# Altium PCB doorzoom_new.PcbDoc
Units mil, origin at the board's own origin, x right, y up, seen from the top; angles counter-clockwise.
Board outline 7799.21 x 2870.08 mil, 2 copper layers (Top Layer, Top, Bottom Layer, Bottom); 7 components, 5 nets, 27 pads, 2 vias.
Unrouted connection lines stored in the file: 2.
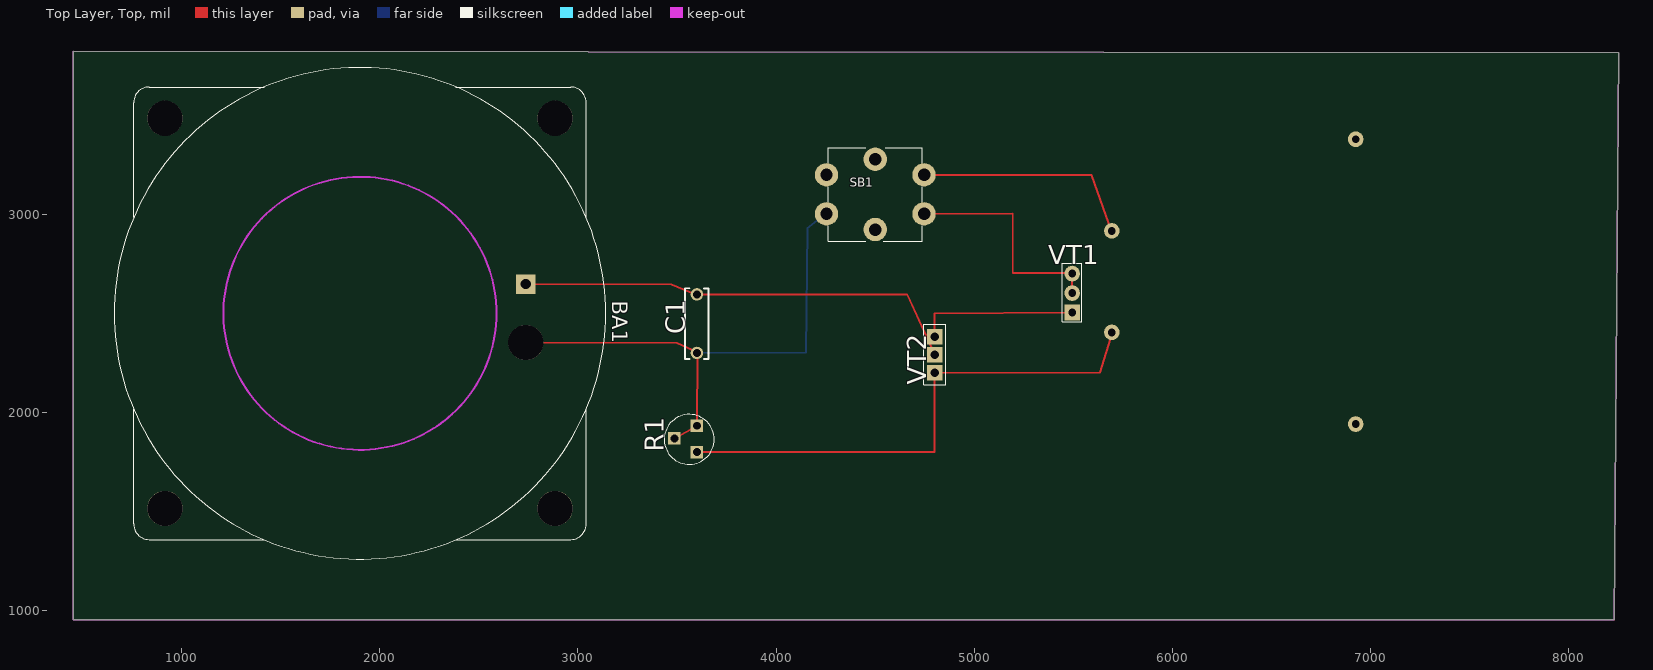
[diagram p0: Top Layer, Top view]
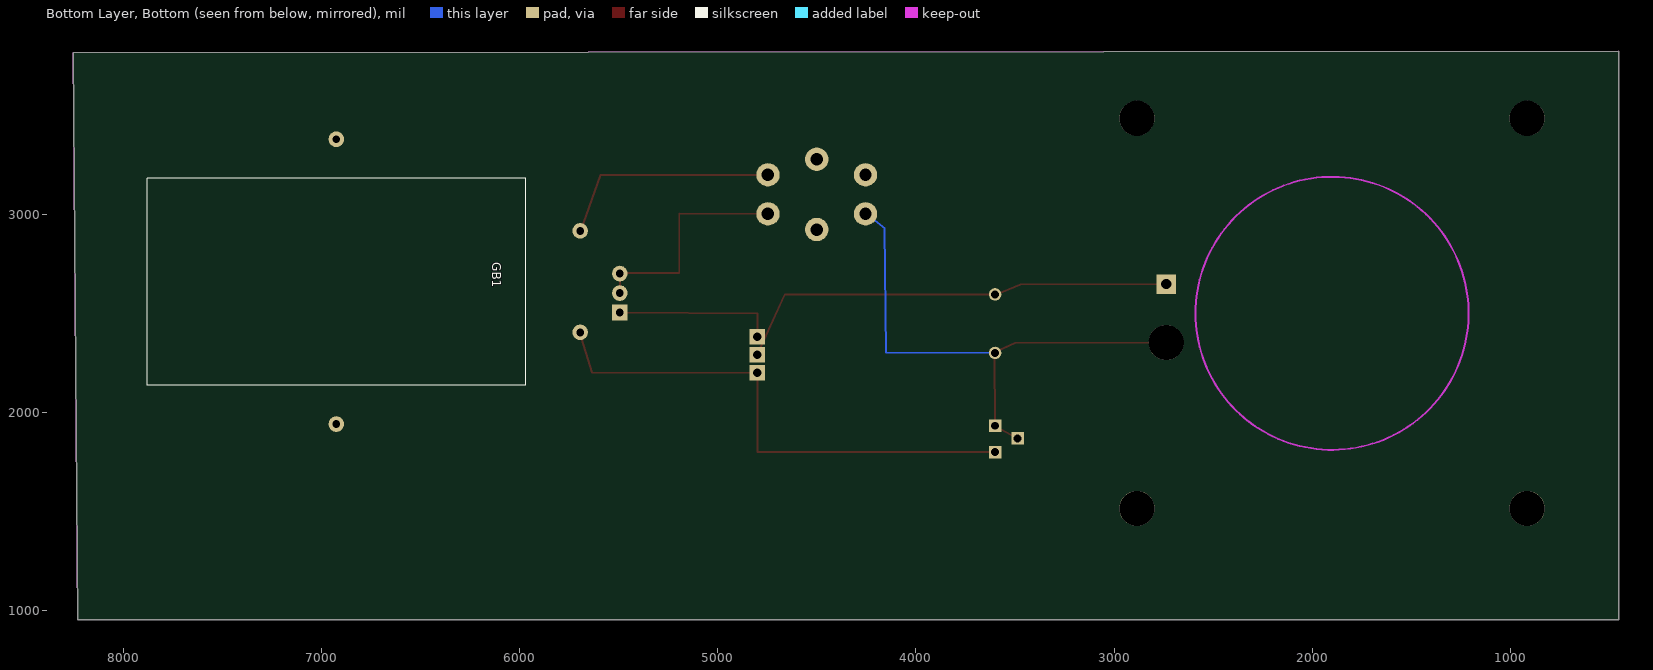
[diagram p1: Bottom Layer, Bottom view, seen from below]

## Layer stack, top to bottom
Top Solder, Top Mask: solder mask 0.4, Solder Resist, Dk 3.5
Top Layer, Top: signal copper 1.4
Dielectric 1: dielectric 12.6, FR-4, Dk 4.8
Bottom Layer, Bottom: signal copper 1.4
Bottom Solder, Bot Mask: solder mask 0.4, Solder Resist, Dk 3.5

## Board outline
452.76,3822.83 452.76,964.57 452.76,952.76 8228.35,952.76 8251.97,3814.96

## Design rules (kind name [scope] priority, off if disabled: settings)
Clearance [All] p1: gap=10 ignorepadtopadclearanceinfootprint=FALSE except(0: Arc-Hole Track-Hole SMDPad-Hole THPad-Hole Via-Hole Fill-Hole Poly-Hole Region-Hole Text-Hole; 11.81: Arc-Arc Arc-Track Arc-THPad Arc-Via Track-Track Track-THPad Track-Via THPad-THPad THPad-Via Via-Via)
PlaneClearance [All] p1: clearance=10
PolygonConnect [All] p1: connectstyle=Relief reliefconductorwidth=10 reliefentries=4 polygonreliefangle="90 Angle" airgapwidth=10
RoutingVias [All] p1: holewidth=28 width=50 viastyle="Through Hole" minholewidth=28 minwidth=50 maxholewidth=28 maxwidth=50
SolderMaskExpansion [All] p1: expansion=4 istentingtop=FALSE
Width [All] p1: maxlimit=10 minlimit=10 preferedwidth=10
29 further rules are at their usual default settings.

## Components (designator, comment, footprint, x,y, rotation, side; value= is the part's Value field where it differs from the comment)
BA1 "" 0,25ГД-10 1900,2500 r270 top
C1 "0.01mk" K1017-2 3600,2300 r90 top
GB1 "" KRONA_KRONA(Primary) 5693.7,2403.94 r270 bottom
R1 "100k" SP3-19A1 3600,1800 r90 top
SB1 "" KAN1210-0731B 4500,3100 r0 top
VT1 "" KT13_КТ315Г(Primary) 5493.7,2503.94 r0 top
VT2 "" KT-27_Primary 4800,2200 r90 top

## Footprints (in the part's own frame and the unit in brackets; to place one, negate y for a bottom-side part, rotate by r counter-clockwise, add the part's x,y. Pads: shape width x height; smd on the part's side, far side on the other; paste and mask are expansions set on the pad)
0,25ГД-10 [mm]
  rect 2.5x2.5 hole 1.3: 1(-3.75,21.25)
  round 4.5 hole 4.5: 2(3.75,21.25) 3(-25,25) 4(25,25) 5(25,-25) 6(-25,-25)
  Keep-Out Layer, Board circle w0.25: c0,0 r17.5
  silkscreen extent -31.5,-31.5 31.5,31.5
K1017-2 [mm]
  round 1.6 hole 1: 1(0,0) 2(7.5,0)
  silkscreen extent -0.76,-1.5 8.29,1.53
KAN1210-0731B [mm]
  round 3 hole 1.6: 1(-6.25,2.5) 2(6.25,2.5) 3(-6.25,-2.5) 4(6.25,-2.5) 5(0,4.5) 6(0,-4.5)
  silkscreen extent -6,-6 6,6
KRONA_KRONA(Primary) [mm]
  round 2 hole 1: 1(11.75,-31.25) 2(-24.75,-31.25) minus(-13,0) plus(0,0)
  silkscreen extent -19.75,-55.5 6.75,-7
KT13_КТ315Г(Primary) [mm]
  rect 2x2 hole 1: 1(0,0)
  round 2 hole 1: 2(0,5) 3(0,2.5)
  silkscreen extent -1.25,-1.17 1.25,6.33
KT-27_Primary [mm]
  rect 2x2 hole 1.1: 1(0,0) 2(2.3,0) 3(4.6,0)
  silkscreen extent -1.56,-1.41 6.24,1.39
SP3-19A1 [mm]
  rect 1.6x1.6 hole 1: 1(0,0) 2(1.75,2.875) 3(3.375,0)
  silkscreen extent -1.57,-2.21 4.83,4.19

## Via types
v1: diameter 40, hole 18, Top Layer, Top to Bottom Layer, Bottom, 2 vias

## Nets (pads, with @x,y where several pads share a name; then routed paths per layer and width w, separated by ;. In a path a pad name is that pad's centre, name@x,y a point inside that pad or via, vN(x,y) a via of type N, cw(c..) or ccw(c..) an arc to the next point about the centre after c; other vN are vias at no path point)
NET00000: GB1.plus R1.1 VT2.1 | length 2651.6
  Top Layer, Top w10: R1.1 4800,1800 VT2.1 5633.86,2200.79 5696.85,2405.51 GB1.plus
NET00001: VT1.1 VT2.3 | length 812.6
  Top Layer, Top w10: VT2.3 4800,2500 VT1.1
NET00002: GB1.minus SB1.1 SB1.2 | length 1160.2
  Top Layer, Top w10: SB1.2 5590.55,3196.85 5692.91,2913.39 GB1.minus GB1.minus@5693.7,2903.94
NET00004: BA1.2 C1.1 R1.2 R1.3 SB1.3 SB1.4 VT1.2 VT1.3 | length 3865.8
  Top Layer, Top w10: BA1.2 3500,2350.39 C1.1@3599.16,2304.63 ; R1.2 3602.36,1933.07 R1.3@3600,1933.07 ; v1(3598.43,1933.07) R1.3@3600,1933.07 ; v1(3598.43,2303.15) C1.1@3599.16,2304.63 ; R1.3 R1.3@3600,1933.07 ; C1.1 3602.36,2303.15 C1.1@3599.16,2304.63 ; SB1.4 5193.7,3003.94 5193.7,2703.94 5493.7,2703.94 VT1.2 VT1.3 ; C1.1@3599.16,2304.63 3602.36,2311.02 3602.31,2303.08 R1.3@3600,1933.07
  Bottom Layer, Bottom w10: v1(3598.43,1933.07) R1.3 ; v1(3598.43,2303.15) C1.1 4149.61,2303.15 4157.48,2929.13 4255.91,3007.87 SB1.3
NET00005: BA1.1 C1.2 VT2.2 | length 2303.4
  Top Layer, Top w10: BA1.1 3472.44,2645.67 3606.3,2590.55 C1.2@3606.36,2595.27 ; VT2.2 4803.15,2283.46 4661.42,2594.49 C1.2@3606.36,2595.27 ; C1.2@3606.36,2595.27 C1.2 3606.3,2594.49 C1.2@3606.36,2595.27
pads on no net: BA1.3 BA1.4 BA1.5 BA1.6 GB1.1 GB1.2 SB1.5 SB1.6

## Keep-outs
Keep-Out Layer, Board:
  the board outline again, w5

## Text inside footprints (layer, text, board x,y; h text height)
VT1: Mechanical 1, Top Assy "Б" at 5405.12,2684.25 h78.12; Mechanical 1, Top Assy "К" at 5405.12,2585.83 h78.12; Mechanical 1, Top Assy "Э" at 5405.12,2477.56 h78.12